# Altium PCB RX_FOR_PI.PcbDoc
Units mil, origin at the board's own origin, x right, y up, seen from the top; angles counter-clockwise.
Board outline 880.03 x 945.03 mil, 4 copper layers (Top Layer, Internal Plane 1, Signal Layer 1, Bottom Layer), stack 29.965 mil thick; 47 components, 36 nets, 185 pads, 88 vias.
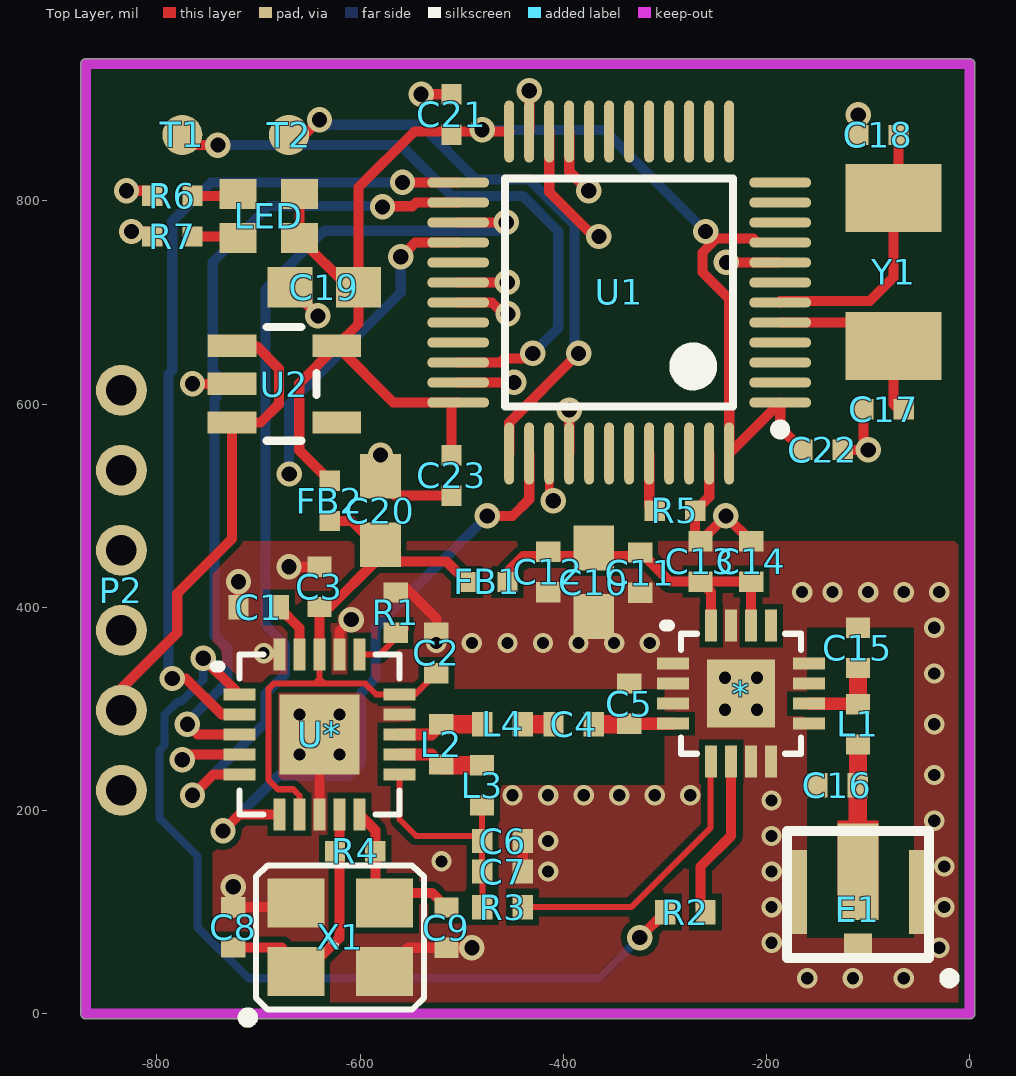
[diagram p0: Top Layer view]
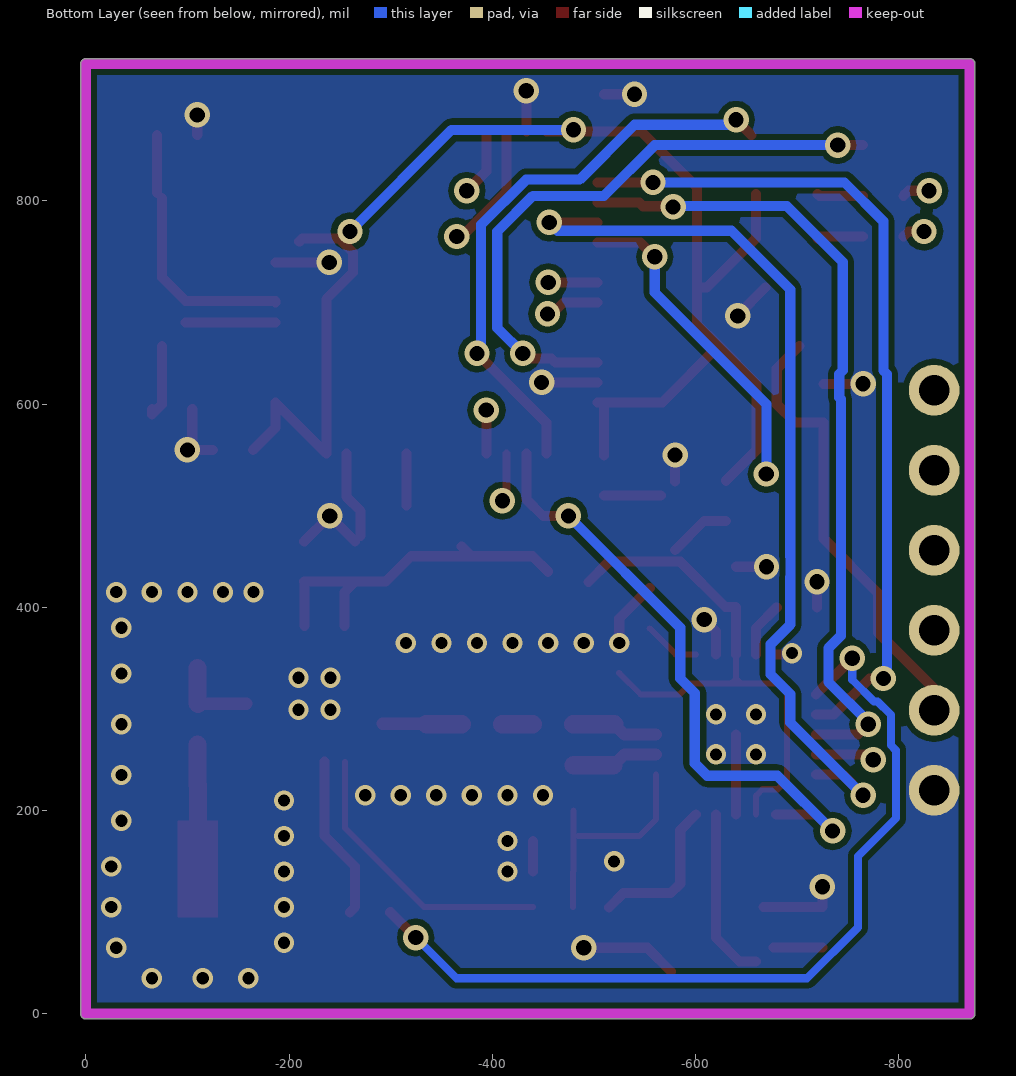
[diagram p1: Bottom Layer view, seen from below]
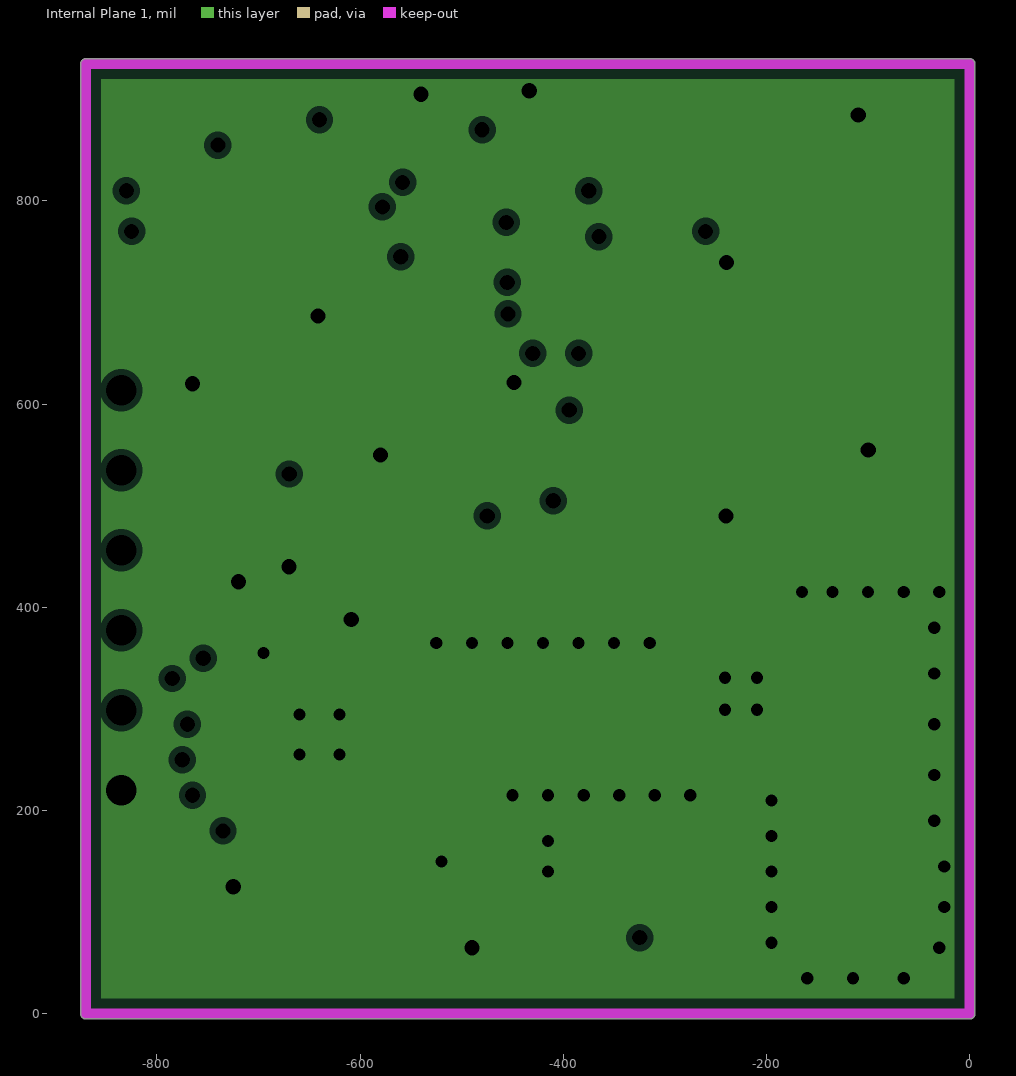
[diagram p2: Internal Plane 1, clearances drawn from the general rule]
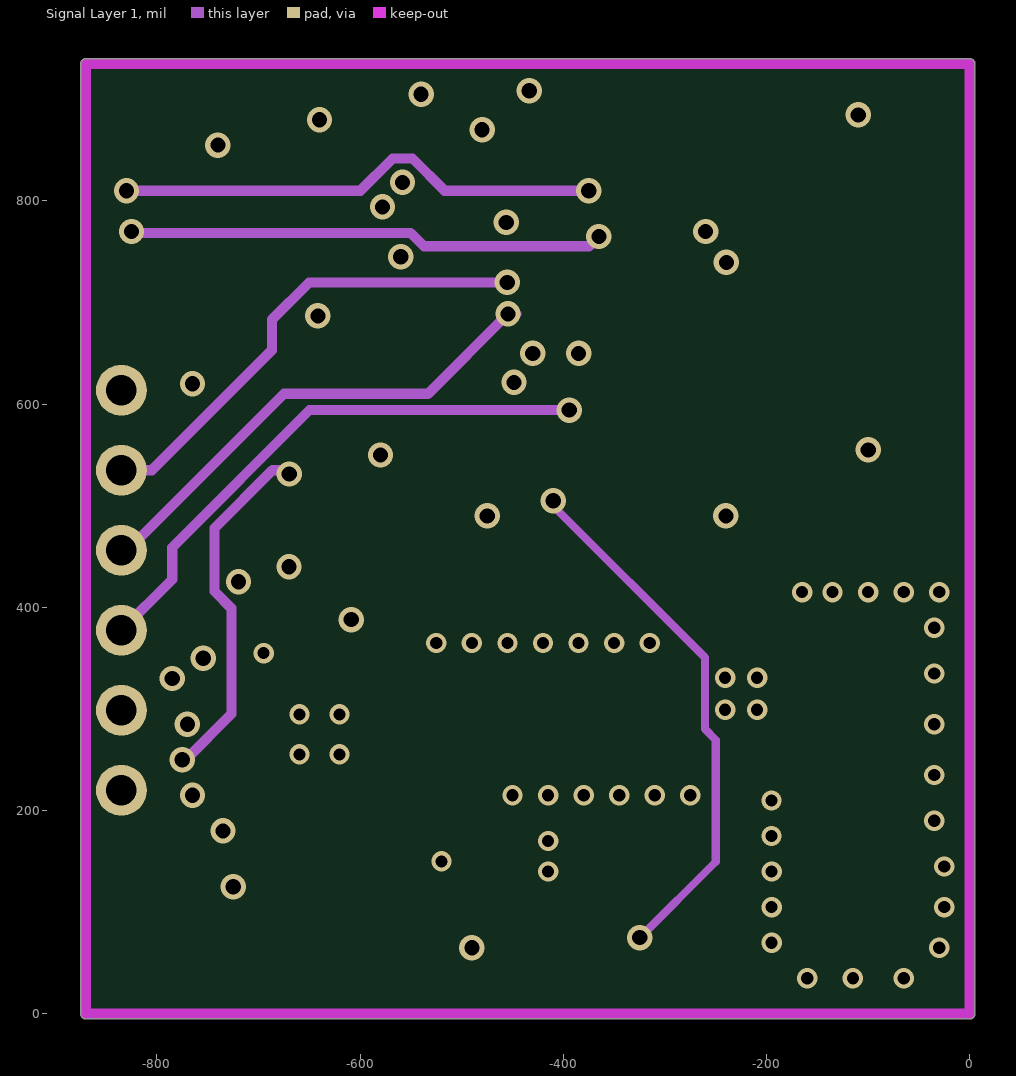
[diagram p3: Signal Layer 1]

## Layer stack, top to bottom
Top Solder: solder mask 0.4, Solder Resist, Dk 3.5
Top Layer: signal copper 1.4
Dielectric 1: prepreg 5, FR-4, Dk 4.2
Internal Plane 1: plane copper 0.7087, net GND
Dielectric 3: core 15.748, Dk 4.2
Signal Layer 1: signal copper 0.7087
Dielectric 2: prepreg 5, Dk 4.2
Bottom Layer: signal copper 1.4
Bottom Solder: solder mask 0.4, Solder Resist, Dk 3.5

## Board outline
-875.02,0 ccw(c-870,0) -870,-5.02 0,-5.02 ccw(c0,0) 5.02,0 5.02,935 ccw(c0,935) 0,940.01 -870,940.01 ccw(c-870,935) -875.02,935

## Design rules (kind name [scope] priority, off if disabled: settings)
Clearance [All] p1: gap=6
MinimumSolderMaskSliver [All] p1 off: minsoldermaskwidth=10
PlaneClearance [All] p1: clearance=6
PlaneConnect [All] p1: planeconnectstyle=Direct reliefexpansion=20 reliefentries=4 reliefconductorwidth=10 reliefairgap=10
PolygonConnect [All] p1: connectstyle=Direct reliefconductorwidth=10 reliefentries=4 polygonreliefangle="90 Angle" airgapwidth=10
RoomDefinition MCU [InComponentClass('MCU')] p1 off: confinementstyle=ConfineIn formatcopy=TRUE lockcomponents=FALSE outline 50,55 480,55 480,585 50,585
RoomDefinition RF [InComponentClass('RF')] p2 off: confinementstyle=ConfineIn formatcopy=TRUE lockcomponents=FALSE outline 1910,-455 4775,-455 4775,-145 1910,-145
RoutingVias [All] p1: holewidth=28 width=50 viastyle="Through Hole" minholewidth=15 minwidth=20 maxholewidth=28 maxwidth=50
SilkToSilkClearance [All] p1 off: silktosilkclearance=10
SilkToSolderMaskClearance [IsPad] p1 off: minsilkscreentomaskgap=10 clearancetoexposedcopper=TRUE
SolderMaskExpansion [All] p1 off: expansion=4
UnpouredPolygon [All] p1: allowunpoured=FALSE
Width [All] p1: maxlimit=20 minlimit=6 preferedwidth=10
24 further rules are at their usual default settings.

## Classes and differential pairs
component class MCU: C17 C18 C21 C22 C23 LED P2 R5 R6 R7 T1 T2 U1 Y1
component class RF: * C1 C2 C3 C4 C5 C6 C7 C8 C9 C10 C11 C12 C13 C14 C15 C16 C19 C20 E1 FB1 FB2 L1 L2 L3 L4 R1 R2 R3 R4 U2 U* X1

## Components (designator, comment, footprint, x,y, rotation, side; value= is the part's Value field where it differs from the comment)
* "RFX2401C" RFX2401C -225,315 r0 top
C1 "Cap" 0402#1 -700,400 r0 top
C2 "Cap" 0402#1 -525,355 r90 top
C3 "Cap" 0402#1 -640,420 r90 top
C4 "Cap" 0402#1 -390,285 r0 top
C5 "Cap" 0402#1 -335,305 r90 top
C6 "Cap" 0402#1 -460,170 r0 top
C7 "Cap" 0402#1 -460,140 r0 top
C8 "Cap" 0402#1 -725,85 r90 top
C9 "Cap" 0402#1 -515,85 r270 top
C10 "10uF" 0603 -370,425 r270 top
C11 "Cap" 0402#1 -324.44,434.32 r270 top
C12 "Cap" 0402#1 -415,435 r270 top
C13 "Cap" 0402#1 -265,445 r90 top
C14 "Cap" 0402#1 -215,445 r90 top
C15 "Cap" 0402#1 -110,360 r90 top
C16 "Cap" 0402#1 -130,225 r180 top
C17 "22pF" 0402#2 -85,595 r0 top
C18 "22pF" 0402#2 -90,865 r0 top
C19 "10uF" 0603 -635,715 r180 top
C20 "10uF" 0603 -580,495 r90 top
C21 "0.1uF" 0402#2 -510,885 r90 top
C22 "0.1uF" 0402#2 -145,555 r0 top
C23 "0.1uF" 0402#2 -510,530 r270 top
E1 "Antenna" IPEX -110,120 r180 top
FB1 "FB" 0402#2 -475,425 r0 top
FB2 "FB" 0402#2 -630,505 r270 top
L1 "Inductor" 0402#1 -110,285 r270 top
L2 "Inductor" 0402#1 -520,265 r90 top
L3 "Inductor" 0402#1 -480,225 r270 top
L4 "Inductor" 0402#1 -460,285 r0 top
LED "LEDx2" LC-0603_Rx2 -690,785 r90 top
P2 "PPMInf" PPMInf -835,220 r0 top
R1 "Res2" 0402#1 -565,395 r270 top
R2 "Res2" 0402#1 -280,100 r0 top
R3 "Res2" 0402#1 -460,105 r0 top
R4 "1M" 0402#2 -605,160 r0 top
R5 "10k" 0402#2 -290,495 r180 top
R6 "1k" 0402#2 -785,805 r0 top
R7 "1k" 0402#2 -785,765 r0 top
T1 "TestPad" "TestPad - 1mm" -775,865 r0 top
T2 "TestPad" "TestPad - 1mm" -670,865 r0 top
U1 "STM32F103C8T6" LQFP48_L -345,710 r180 top
U2 "LP5907" SOT23-5 -675,620 r270 top
U* "NRF24L01" NRF24L01 -640,275 r0 top
X1 "16Mhz" OSCILLATOR-3.2X2.5 -619.98,75 r0 top
Y1 "XTAL" 5032-crystal -75,730 r270 top

## Footprints (in the part's own frame and the unit in brackets; to place one, negate y for a bottom-side part, rotate by r counter-clockwise, add the part's x,y. Pads: shape width x height; smd on the part's side, far side on the other; paste and mask are expansions set on the pad)
0402#1 [mil] "0402-RES"
  rect 20x24 smd: 1(-19.69,0) 2(20,0)
0402#2 [mil] "0402-RES"
  rect 20x20 smd: 1(-19.69,0) 2(20,0)
0603 [mil] "0603-RES"
  rect 44x40 smd: 1(-33.46,0) 2(34,0)
5032-crystal [mm]
  rect 1.7x2.4 smd: 1(-1.85,0) 2(1.85,0)
  body extent -2.54,-1.65 2.54,1.65, height 1.2
IPEX [mil]
  rect 40x95 smd: 1(0,-20)
  rect 19.68x82.68 smd: 2(-60,0) 2(60,0)
  rect 27.56x27.56 smd: 2(0,55)
  Top Layer region: -20,-70 20,-70 20,25 -20,25
  silkscreen extent -95,-60 70,90
LC-0603_Rx2 [mm]
  rect 0.75x0.93 smd: 1(-0.55,-0.77) 2(0.55,-0.77) 3(0.55,0.77) 4(-0.55,0.77)
LQFP48_L [mm]
  oval 1.55x0.25 smd: 1(-4.025,2.75) 2(-4.025,2.25) 3(-4.025,1.75) 4(-4.025,1.25) 5(-4.025,0.75) 6(-4.025,0.25) 7(-4.025,-0.25) 8(-4.025,-0.75) 9(-4.025,-1.25) 10(-4.025,-1.75) 11(-4.025,-2.25) 12(-4.025,-2.75) 25(4.025,-2.75) 26(4.025,-2.25) 27(4.025,-1.75) 28(4.025,-1.25) 29(4.025,-0.75) 30(4.025,-0.25) 31(4.025,0.25) 32(4.025,0.75) 33(4.025,1.25) 34(4.025,1.75) 35(4.025,2.25) 36(4.025,2.75)
  oval 0.25x1.55 smd: 13(-2.75,-4.025) 14(-2.25,-4.025) 15(-1.75,-4.025) 16(-1.25,-4.025) 17(-0.75,-4.025) 18(-0.25,-4.025) 19(0.25,-4.025) 20(0.75,-4.025) 21(1.25,-4.025) 22(1.75,-4.025) 23(2.25,-4.025) 24(2.75,-4.025) 37(2.75,4.025) 38(2.25,4.025) 39(1.75,4.025) 40(1.25,4.025) 41(0.75,4.025) 42(0.25,4.025) 43(-0.25,4.025) 44(-0.75,4.025) 45(-1.25,4.025) 46(-1.75,4.025) 47(-2.25,4.025) 48(-2.75,4.025)
  silkscreen extent -4.15,-2.85 2.85,3.55
NRF24L01 [mm]
  rect 2x2 smd: 0(0,0)
  rect 0.8x0.3 smd: 1(-2,1) 2(-2,0.5) 3(-2,0) 4(-2,-0.5) 5(-2,-1) 11(2,-1) 12(2,-0.5) 13(2,0) 14(2,0.5) 15(2,1)
  rect 0.3x0.8 smd: 6(-1,-2) 7(-0.5,-2) 8(0,-2) 9(0.5,-2) 10(1,-2) 16(1,2) 17(0.5,2) 18(0,2) 19(-0.5,2) 20(-1,2)
  silkscreen extent -2.6,-2 2,2
OSCILLATOR-3.2X2.5 [mil] "OSCILLATOR-3.2X2.5"
  rect 56x48 smd: 1(-43.31,-33.46) 2(44,-33.46) 3(44,34) 4(-43.31,34)
  silkscreen extent -95,-83 83,71
PPMInf [mil]
  round 50 hole 30: 1(0,0) 2(0,78.74) 3(0,157.48) 4(0,236.22) 5(0,314.96) 6(0,393.7)
RFX2401C [mm]
  rect 1.7x1.7 smd: 0(0,0)
  rect 0.8x0.3 smd: 1(-1.7,0.75) 2(-1.7,0.25) 3(-1.7,-0.25) 4(-1.7,-0.75) 9(1.7,-0.75) 10(1.7,-0.25) 11(1.7,0.25) 12(1.7,0.75)
  rect 0.3x0.8 smd: 5(-0.75,-1.7) 6(-0.25,-1.7) 7(0.25,-1.7) 8(0.75,-1.7) 13(0.75,1.7) 14(0.25,1.7) 15(-0.25,1.7) 16(-0.75,1.7)
  silkscreen extent -1.9,-1.5 1.5,1.7
SOT23-5 [mil] "SOT23-5"
  rect 22x48 smd: 1(-37.4,-51.19) 2(0,-51.19) 3(38,-51.19) 4(38,52) 5(-37.4,52)
  silkscreen extent -56,-17 56,32
"TestPad - 1mm" [mm]
  round 1 smd: 1(0,0)

## Part data
C1 C2 C3 C4 C5 C6 C7 C8 C9 C11 C12 C13 C14 C15 C16: "Capacitor"
C10 C17 C18 C19 C20 C21 C22 C23: library part Cap, "Capacitor"
E1: "Generic Antenna"
FB1 FB2 R4 R5 R6 R7: library part Res2, "Resistor"
LED: "Typical RED GaAs LED"
R1 R2 R3: "Resistor"
U1: "STM32 ARM-based 32-bit MCU with 64 Kbytes Flash, 48-pin LQFP, Industrial Temperature"
X1: library part OSCILLATOR-3.2X2.5, "Crystal Oscillator in 3.2x2.5 SMD"
Y1: "Crystal Oscillator"

## Via types
v1: diameter 20, hole 12, Top Layer to Bottom Layer, 44 vias
v2: diameter 25, hole 15, Top Layer to Bottom Layer, 42 vias
v3: diameter 19.68, hole 11.81, Top Layer to Bottom Layer, 2 vias

## Nets (pads, with @x,y where several pads share a name; then routed paths per layer and width w, separated by ;. In a path a pad name is that pad's centre, name@x,y a point inside that pad or via, vN(x,y) a via of type N, cw(c..) or ccw(c..) an arc to the next point about the centre after c; other vN are vias at no path point)
3.3: C19.1 C21.1 C22.1 C23.1 FB2.1 LED.1 LED.2 U1.1 U1.9 U1.24 U1.36 U1.48 U2.5 | length 1476.5
  Top Layer w10: LED.2 LED.1 -611.34,715 C19.1 ; FB2.1 -660,554.68 -660,620.4 U2.5 ; C23.1 -510,595.2 ; U1.36 -567.33,601.73 U2.5 ; U1.24 -546.54,868.46 -601.54,813.46 C19.1 ; v2(-260,770) -253.03,763.03 -249.26,763.03 ; U1.9@-210,760 -212.98,762.98 -218.72,762.98 -218.77,763.03 -249.26,763.03 ; C22.1 -186.54,576.85 U1.1 U1.48 -236.73,703.5 -263.03,729.79 -263.03,749.26 -249.26,763.03 ; U2.5 -601.54,678.87 C19.1
  Bottom Layer w10: v2(-480,870) -360,870 v2(-260,770)
3.3NRF: C2.1 C3.1 C20.1 FB1.1 FB2.2 U*.7 U*.15 U*.18 | length 643.6
  Top Layer w6: U*.7 -659.69,214.68 -666.01,221.01 -681.01,221.01 -690,230 -690,320 -685,325 -645,325 ; U*.18 -640,330 ; C2.1 -545.94,314.37 U*.15 -584.37,314.37 -595,325 -635,325 ; -645,325 -635,325 ; -645,325 -640,330 ; -640,330 -635,325
  Top Layer w10: U*.18 C3.1 -629.69,400.32 -585,445 -514.69,445 FB1.1 ; FB2.2 -608.46,485 C20.1@-580,456.54
3.3PA: *.14 *.16 C10.1 C11.1 C12.1 C13.1 C14.1 FB1.2 | length 371.7
  Top Layer w10: -455,435 -439.69,450.32 C10.1@-379.69,450.32 ; C10.1@-390,450.32 C10.1@-379.69,450.32 ; C10.1@-370,460 C10.1@-379.69,450.32 ; *.16 -254.53,414.84 C13.1 ; *.14 C14.1@-215.16,425.16 ; C14.1 C13.1 ; C10.1@-379.69,450.32 -320,450.32 -295,425.32 C13.1
5V: P2.2 U2.1 U2.3 | length 427.4
  Top Layer w10: P2.2@-835,320 -780,375 -780,413.74 -726.19,467.55 U2.3 -698,582 -680,600 -680,635 U2.1@-702.4,657.4
GND: *.0 *.1 *.2 *.3 *.7 *.8 *.9 *.11 *.12 *.15 C1.1 C2.2 C3.2 C5.2 C6.2 C7.2 C8.2 C9.2 C10.2 C11.2 C12.2 C13.2 C14.2 C15.2 C16.2 C17.1 C18.1 C19.2 C20.2 C21.2 C22.2 C23.2 E1.2 P2.1 R1.1 R5.1 U1.8 U1.23 U1.35 U1.47 U2.2 U*.0 U*.8 U*.14 U*.17 U*.20 X1.2 X1.4 | length 1025.1
  Top Layer w10: v2(-765,620) U2.2 ; v2(-725,125) C8.2 X1.4@-667.29,105 ; C1.1 v2(-719.69,425.32) ; v1@-693.74,353.74 U*.20 ; v2(-670,440) C3.2 ; C19.2 -641.6,687.6 v2(-641.6,686.9) ; U*.8 U*.0 ; U*.17 -620.31,376.45 v2(-608.78,387.99) ; C20.2@-580,524 v2(-580,550) ; X1.2 -552.52,65 C9.2 v2(-490,65) ; C20.2@-566,510 C23.2 ; R1.1@-555,419.06 -525,389.06 C2.2 ; v2(-540,905) C21.2 ; U1.35 v2(-448.58,621.42) ; C7.2 C6.2 ; U1.23 v2(-433.58,908.58) ; C13.2@-270.31,470.32 R5.1 -256.42,508.9 U1.47 ; C13.2 v2(-240,490) C14.2 ; v2(-239.53,739.53) U1.8 ; C22.2 v2(-100,555) ; C18.1 v2(-109.69,884.68) ; v2@-104.69,559.68 C17.1
  Signal Layer 1 w10: v2(-608.78,387.99) v2@-607.01,387.99
  other v1: -160,35 -115,35 -65,35 -30,65 -195,70 -195,105 -25,105 -415,140 -195,140 -25,145 -520,150 -415,170 -35,190 -450,215 -415,215 -380,215 -345,215 -310,215 -275,215 -35,235 -659.69,255.32 -620.31,255.32 -35,285 -659.69,294.68 -620.31,294.68 -240.75,299.25 -209.25,299.25 -240.75,330.75 -209.25,330.75 -35,335 -695,355 -525,365 -490,365 -455,365 -420,365 -385,365 -350,365 -315,365 -35,380 -165,415 -135,415 -100,415 -65,415 -30,415
  other v3: -195,175 -195,210
Net*_4: *.4 C4.2 C5.1 | length 78.3
  Top Layer w12: C5.1 -334.84,285.47 *.4
  Top Layer w18: C4.2 -335.31,285 C5.1
Net*_5: *.5 R3.2 | length 281.8
  Top Layer w6: R3.2 -333.13,105 -255,183.13 *.5@-255,247.6
Net*_6: *.6 R2.2 | length 162.6
  Top Layer w10: R2.2 -265,105 -265,145 -234.84,175.16 *.6
Net*_10: *.10 C15.1 L1.1 | length 83.6
  Top Layer w12: *.10 -110.47,305.16 L1.1
  Top Layer w18: L1.1@-110.47,305.16 -110,305.63 C15.1
NetC1_2: C1.2 U*.19 | length 54.7
  Top Layer w10: C1.2 -659.69,379.68 U*.19
NetC4_1: C4.1 L4.2 | length 30.3
  Top Layer w18: L4.2 C4.1
NetC6_1: C6.1 C7.1 L3.2 R3.1 U*.11 | length 222.4
  Top Layer w6: U*.11 -561.26,191.26 -545,175 C6.1@-484.69,175 ; C7.1@-480,140.32 L3.2@-480,200 ; R3.1 C7.1
NetC8_1: C8.1 R4.1 U*.9 X1.1 | length 218.1
  Top Layer w10: C8.1 X1.1@-677.09,65.32 ; X1.1@-659.31,51.54 -643.46,51.54 -620.31,74.68 U*.9
NetC9_1: C9.1 R4.2 U*.10 X1.3 | length 154.4
  Top Layer w10: U*.10 -585,180.63 -585,128 -576,119 -529.31,119 C9.1
NetC16_1: C16.1 E1.1 L1.2 | length 125.3
  Top Layer w6: C16.1 C16.1@-110,225.32
  Top Layer w18: C16.1 -110.31,140.32 E1.1 ; C16.1@-110,225.32 L1.2
NetC17_2: C17.2 U1.5 Y1.2 | length 164.5
  Top Layer w10: U1.5 Y1.2@-98.31,680.47 ; Y1.2 -75,600 -65,590 C17.2
NetC18_2: C18.2 U1.6 Y1.1 | length 257.7
  Top Layer w10: U1.6 -186.54,701.63 -98.37,701.63 -75,725 Y1.1 ; Y1.1@-70,807.83 C18.2
NetL2_1: L2.1 L3.1 U*.12 | length 85.2
  Top Layer w6: L2.1 L2.1@-519.69,245
  Top Layer w12: U*.12 -530,255.32 L2.1
  Top Layer w18: L2.1@-519.37,244.68 L3.1
NetL2_2: L2.2 L4.1 U*.13 | length 85.7
  Top Layer w12: U*.13 -530,275 L2.2
  Top Layer w18: L2.2 L4.1
NetLED_3: LED.3 R6.2 | length 45.4
  Top Layer w10: R6.2 -721.97,805 LED.3
NetLED_4: LED.4 R7.2 | length 45.4
  Top Layer w10: R7.2 -721.97,765 LED.4
NetR1_2: R1.2 U*.16 | length 56.2
  Top Layer w6: U*.16 -580.63,353.74 R1.2@-555,379.37
NetR2_1: R2.1 U1.39 U*.1 | length 1438.1
  Top Layer w8: U1.39 -413.9,503.9 -411.1,503.9 v2(-410,505)
  Top Layer w10: v2(-754.37,350) U*.1 ; v2(-324.69,75) R2.1
  Signal Layer 1 w8: v2(-410,505) -410,500 -260.75,350.75 -260.75,280.22 -250,269.47 -250,149.68 v2(-324.69,75)
  Bottom Layer w8: v2(-754.37,350) -754.37,328.81 -775.68,307.5 -779.32,307.5 -792.5,294.32 -792.5,264.32 -797.5,259.32 -797.5,192.5 -760,155 -760,85 -710,35 -364.69,35 v2(-324.69,75)
NetR5_2: R5.2 U1.44 | length 51.1
  Top Layer w10: R5.2@-315.47,500.47 U1.44
NetR6_1: R6.1 U1.21 | length 575.1
  Top Layer w10: v2(-830,810) -809.69,810 R6.1 ; U1.21 -394.21,829.21 v2(-375,810)
  Signal Layer 1 w10: v2(-830,810) -599.77,810 -568,841.77 -548.53,841.77 -516.77,810 v2(-375,810)
NetR7_1: R7.1 U1.22 | length 619.1
  Top Layer w10: v2(-825,770) -809.69,770 R7.1 ; U1.22 -413.9,808.9 -370,765 v2(-365,765)
  Signal Layer 1 w10: v2(-825,770) -823.5,768.5 -550.27,768.5 -537.16,755.4 -374.6,755.4 v2(-365,765)
NetT1_1: T1.1 U1.34 | length 602.7
  Top Layer w10: T1.1@-765,855 v2(-740,855) ; U1.34 -462.13,641.1 -458.32,644.92 -435.08,644.92 v2(-430,650)
  Bottom Layer w10: v2(-740,855) -560,855 -510,805 -440,805 -405,770 -405,675 v2(-430,650)
NetT2_1: T2.1 U1.37 | length 573
  Top Layer w10: T2.1@-655,865 v2(-640,880) ; U1.37 -453.27,581.73 v2(-385,650)
  Bottom Layer w10: v2(-640,880) -640,875 -540,875 -486,821 -433.37,821 -389,776.63 -389,654 v2(-385,650)
NetU1_25: U1.25 U*.2 | length 826.2
  Top Layer w10: v2(-785,330) -771.58,330 -736.27,294.68 U*.2 ; v2(-558.27,818.27) U1.25
  Bottom Layer w10: v2@-788.5,333.5 -788.5,629.73 -785,633.23 -785,780 -746.73,818.27 v2(-558.27,818.27)
NetU1_26: U1.26 U*.3 | length 805.1
  Top Layer w10: v2(-770,285) -760,275 U*.3 ; v2(-578.04,794.2) -578.04,796.96 -576.42,798.58 -571.82,798.58 -568,794.77 -548.53,794.77 -544.72,798.58 U1.26
  Bottom Layer w10: v2(-770,285) -770,287.37 -730.87,326.5 -730.87,359.73 -743.19,372.05 -743.19,605.08 -741.5,606.77 -741.5,629.73 -745,633.23 -745,740 -690,795 -578.84,795 v2(-578.04,794.2)
NetU1_27: U1.27 U*.5 | length 910.5
  Top Layer w10: v2(-765,215) -744.37,235.63 U*.5 ; U1.27 v2(-456.1,778.9)
  Bottom Layer w10: v2(-765,215) -693.3,286.7 -693.3,314.7 -674,334 -674,363.7 -693.3,383 -693.3,429.87 -693.5,430.07 -693.5,449.73 -693.3,449.93 -693.3,712.93 -635.54,770.7 -464.3,770.7 v2(-456.1,778.9)
NetU1_28: U1.28 U*.4 | length 735.6
  Top Layer w10: v2(-775,250) -769.69,255.32 U*.4 ; v2(-560,745) -545.79,759.21 U1.28
  Signal Layer 1 w10: v2(-775,250) -771.77,250 -726.77,295 -726.77,399.16 -743.19,415.58 -743.19,478.18 -686.37,535 -673.55,535 v2(-669.8,531.26)
  Bottom Layer w10: v2(-669.8,531.26) -670,531.45 -670,600 -560,710 v2(-560,745)
NetU1_38: U1.38 U*.6 | length 613.9
  Top Layer w10: v2(-735,180) -718.74,196.26 U*.6 ; v2(-475,490) -450,490 -433.58,506.42 U1.38
  Bottom Layer w10: v2(-735,180) -680.69,234.32 -611.62,234.32 -599.31,246.62 -599.31,315.68 -585,330 -585,380 v2(-475,490)
PPM: P2.3 U1.40 | length 591.7
  Top Layer w10: U1.40 v2(-394.21,594.21)
  Signal Layer 1 w10: P2.3 -785,427.48 -785,459 -649.78,594.21 v2(-394.21,594.21)
RX1: P2.4 U1.31 | length 532.9
  Top Layer w10: U1.31 -470.16,700.16 -458.84,688.84 v2(-454.45,688.84)
  Signal Layer 1 w10: P2.4@-828.99,456.22 -675,610.21 -533.08,610.21 v2(-454.45,688.84) v2@-446.16,688.84
TX1: P2.5 U1.30 | length 522.3
  Top Layer w10: U1.30 v2(-455.16,719.84)
  Signal Layer 1 w10: P2.5 -805.04,534.96 -686.88,653.12 -686.88,683.12 -650.16,719.84 v2(-455.16,719.84)
pads on no net: *.13 P2.6 U1.2 U1.3 U1.4 U1.7 U1.10 U1.11 U1.12 U1.13 U1.14 U1.15 U1.16 U1.17 U1.18 U1.19 U1.20 U1.29 U1.32 U1.33 U1.41 U1.42 U1.43 U1.45 U1.46 U2.4

## Polygon pours and split planes (outlines as drawn)
GND on Top Layer "Top Layer-No Net" (solid, remove dead copper, pour order 4): -745,465 0,465 0,0 -745,0
GND on Bottom Layer "Top Layer-No Net" (solid, remove dead copper, pour order 6): -870,0 0,0 0,930 -865,930 -870,935
GND on Internal Plane 1 (split plane): -15.08,15.08 -854.92,15.08 -854.92,919.92 -15.08,919.92

## Keep-outs
Keep-Out Layer:
  lines w10: -870,0 0,0 0,935 -870,935 -870,0

## Other copper
Top Layer:
  pour cut-out: -550,320 -550,225 -300,225 -300,320
  pour cut-out: -160,75 -55,75 -55,380 -160,380

## Silkscreen, mask and mechanical layers (free items; w line width, h text height)
Top Solder:
  rectangle: -175,15 -45,55